# Altium PCB PCB1.PcbDoc
Units mil, origin at the board's own origin, x right, y up, seen from the top; angles counter-clockwise.
Board outline 6000 x 4000 mil, 2 copper layers (Top Layer, Bottom Layer); 15 components, 14 nets, 53 pads, 0 vias.
Unrouted connection lines stored in the file: 17.
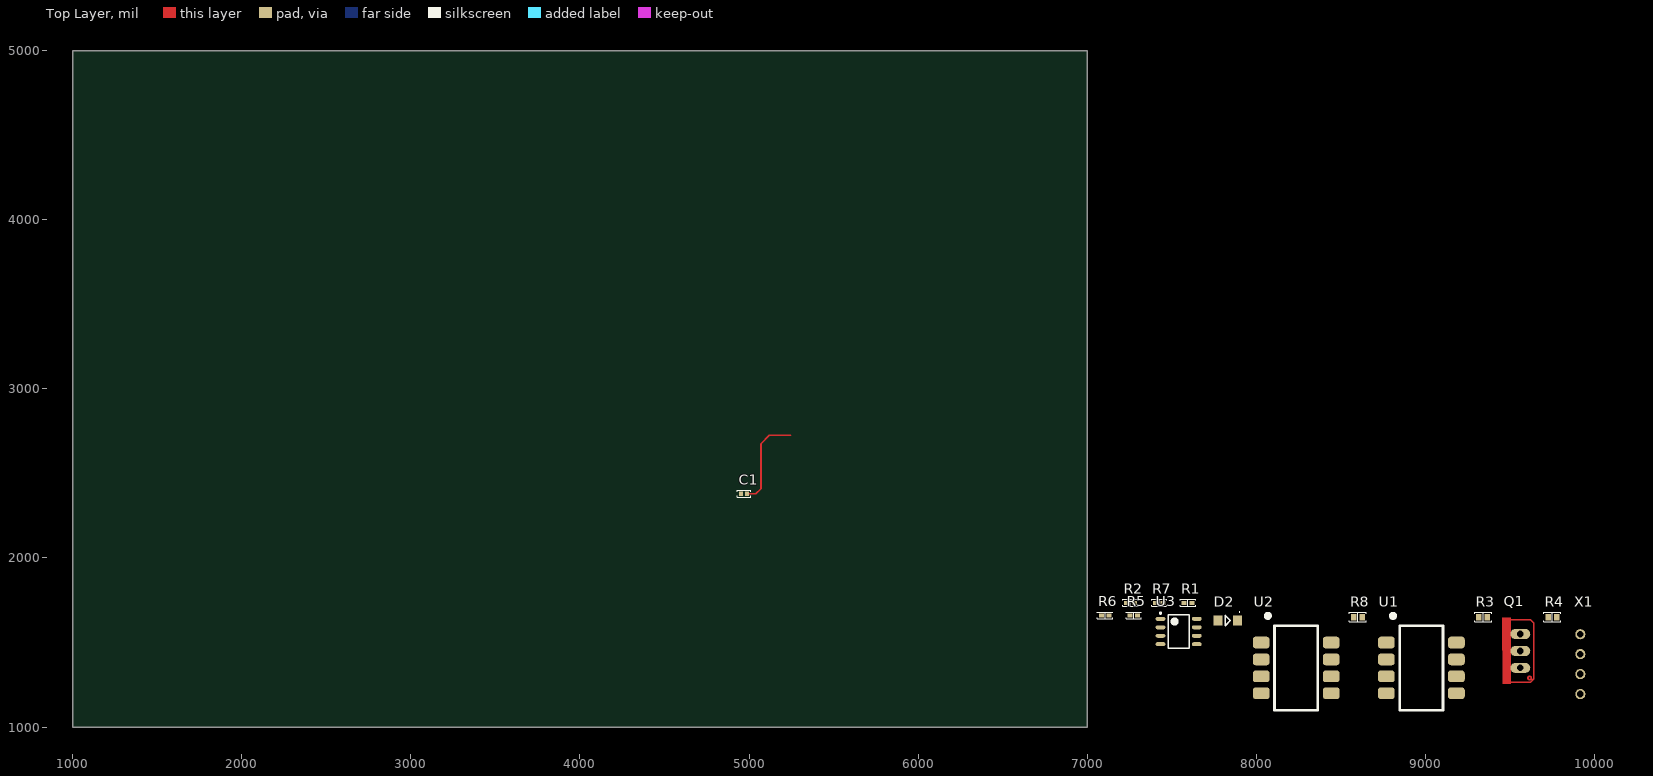
[diagram p0: Top Layer view]
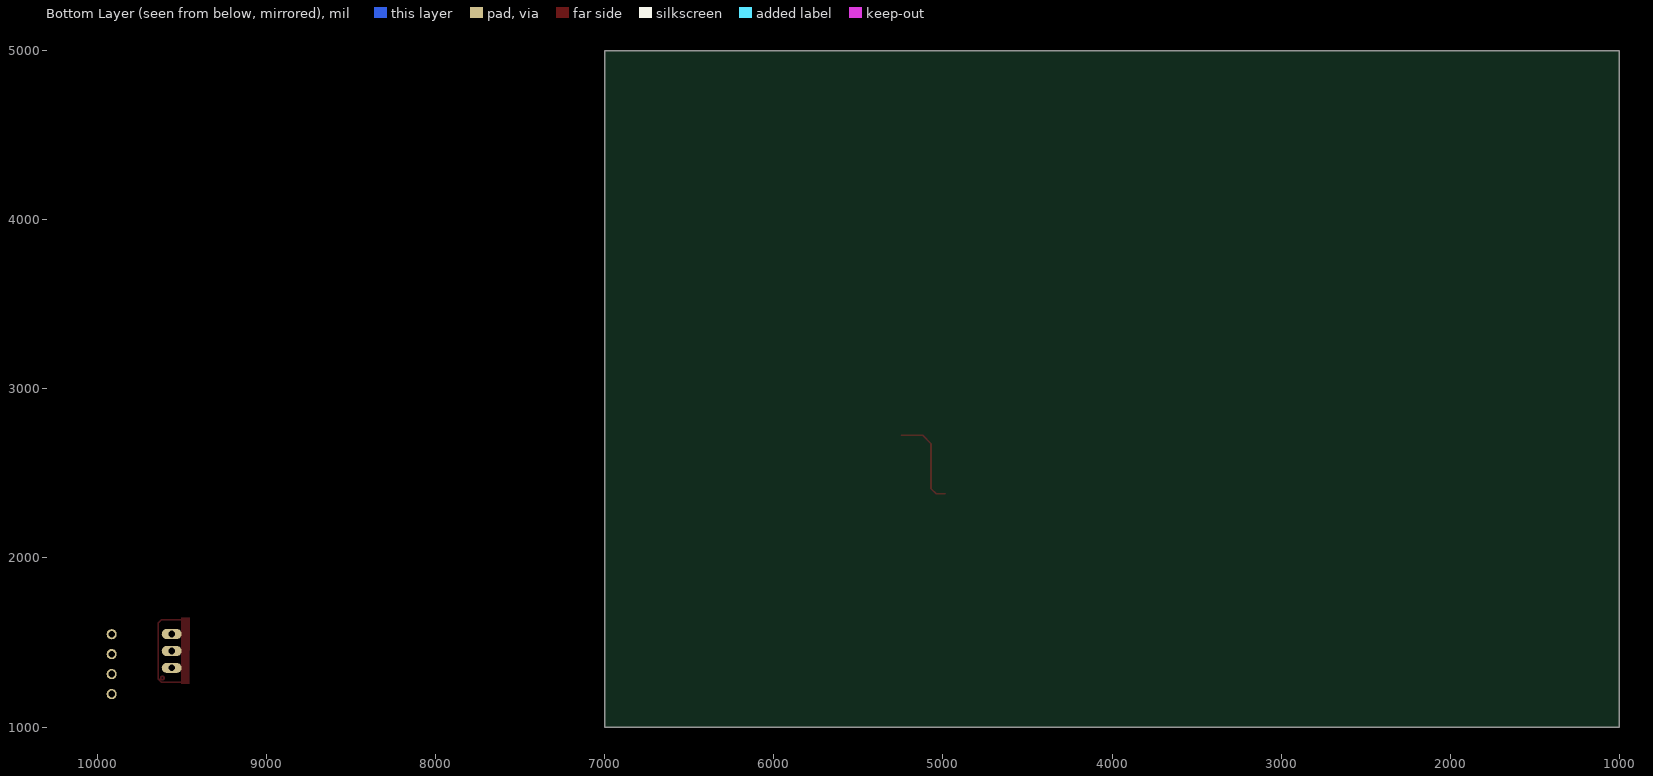
[diagram p1: Bottom Layer view, seen from below]

## Layer stack, top to bottom
Top Solder: solder mask 0.4, Solder Resist, Dk 3.5
Top Layer: signal copper 1.4
Dielectric 1: dielectric 12.6, FR-4, Dk 4.8
Bottom Layer: signal copper 1.4
Bottom Solder: solder mask 0.4, Solder Resist, Dk 3.5

## Board outline
1000,1000 7000,1000 7000,5000 1000,5000

## Design rules (kind name [scope] priority, off if disabled: settings)
Clearance [All] p1: gap=10 ignorepadtopadclearanceinfootprint=FALSE except(0: Arc-Hole Track-Hole SMDPad-Hole THPad-Hole Via-Hole Fill-Hole Poly-Hole Region-Hole Text-Hole)
PolygonConnect [All] p1: connectstyle=Relief reliefconductorwidth=10 reliefentries=4 polygonreliefangle="90 Angle" airgapwidth=10
RoomDefinition HVSchematic [InComponentClass('HVSchematic')] p1: confinementstyle=ConfineIn formatcopy=TRUE lockcomponents=FALSE outline 7045,1060 9165,1060 9165,1865 7045,1865
RoutingVias [All] p1: holewidth=28 width=50 viastyle="Through Hole" minholewidth=28 minwidth=50 maxholewidth=28 maxwidth=50
SolderMaskExpansion [All] p1: expansion=4
Width [All] p1: maxlimit=10 minlimit=10 preferedwidth=10
30 further rules are at their usual default settings.

## Components (designator, comment, footprint, x,y, rotation, side; value= is the part's Value field where it differs from the comment)
C1 "Capacitor MLCC 1.0pf 16V CAP 0402/1005" "CAP 0402/1005" 4970,2380 r0 top value=1.0pf
D2 "DDZ9701-7" SOD123F 7830,1630 r0 top value=14Vz
Q1 "FQP3P50" TO-220AB 9560,1450 r90 top value=P_Channel
R1 "Resistor 1.0 0402 1/10W 1%" "RES 0402/1005" 7595,1735 r0 top value=1.0
R2 "Resistor 1.0 0402 1/10W 1%" "RES 0402/1005" 7255,1735 r0 top value=1.0
R3 "Resistor 1.0M 0603 1/10W 10%" "RES 0603/1608" 9340,1650 r0 top value=1.0M
R4 "Temporary" "RES 0603/1608" 9750,1650 r0 top value=1.2k
R5 "Resistor 1.0 0402 1/10W 1%" "RES 0402/1005" 7275,1660 r0 top value=1.0
R6 "Resistor 1.0 0402 1/10W 1%" "RES 0402/1005" 7105,1660 r0 top value=1.0
R7 "Resistor 1.0 0402 1/10W 1%" "RES 0402/1005" 7425,1735 r0 top value=1.0
R8 "Resistor 33M 0603 1/10W 10%" "RES 0603/1608" 8600,1650 r0 top value=33M
U1 "VO2223B" "Option 7" 8975,1350 r0 top
U2 "VO2223B" "Option 7" 8235,1350 r0 top
U3 "LM555 Timer" SOIC-8 7540,1565 r0 top
X1 "43650-0402" Molex_43650_0402 9915,1195 r0 top value=CONN

## Footprints (in the part's own frame and the unit in brackets; to place one, negate y for a bottom-side part, rotate by r counter-clockwise, add the part's x,y. Pads: shape width x height; smd on the part's side, far side on the other; paste and mask are expansions set on the pad)
"CAP 0402/1005" [mm] "Chip Capacitor, 2-Leads, Body 1.02x0.51mm, IPC Medium Density"
  rect 0.6x0.64 smd: 1(-0.44,0) 2(0.44,0)
  silkscreen extent -1,-0.5 1,0.5, body extent -0.5,-0.26 0.5,0.26, height 0.52
Molex_43650_0402 [mm]
  round 1.524 hole 1.02: 1(0,0) 2(0,3) 3(0,6) 4(0,9)
  round 0 hole 3.1: 5(4.32,2.15)
  round 0 hole 3: 5(4.32,6.85)
  body extent -1.15,-3.32 8.75,12.33, height 5.57
"Option 7" [mm]
  rrect50% 2.52x1.75 smd mask+0.102: 1(-5.26,3.81)
  rrect50% 2.52x1.75 smd: 2(-5.26,1.27) 3(-5.26,-1.27) 4(-5.26,-3.81) 5(5.26,-3.81) 6(5.26,-1.27) 7(5.26,1.27) 8(5.26,3.81)
  silkscreen extent -4.56,-6.35 3.26,8.11
"RES 0402/1005" [mm] "Chip Resistor, 2-Leads, Body 1.0x0.5mm, IPC Medium Density"
  rect 0.75x0.6 smd: 1(-0.575,0) 2(0.575,0)
  silkscreen extent -1.14,-0.51 1.14,0.51, body extent -0.5,-0.25 0.5,0.25, height 0.35
"RES 0603/1608" [mm] "Chip Resistor, 2-Leads, Body 1.60x0.80mm, IPC Medium Density"
  rect 0.85x0.95 smd: 1(-0.65,0) 2(0.65,0)
  silkscreen extent -1.27,-0.7 1.27,0.7, body extent -0.8,-0.4 0.8,0.4, height 0.45
SOD123F [mm] "SODFL, 2-Leads, Body 1.80x3.50mm, IPC Low Density"
  rect 1.35x1.45 smd: 1(-1.475,0) 2(1.475,0)
  silkscreen extent -0.38,-0.76 1.8,1.29, body extent -1.75,-0.95 1.75,0.95, height 1.15
SOIC-8 [mm] "SOIC, 8-Leads, Body 4.90x3.90mm, Pitch 1.27mm, IPC Medium Density"
  oval 1.45x0.6 smd: 1(-2.725,1.905) 2(-2.725,0.635) 3(-2.725,-0.635) 4(-2.725,-1.905) 5(2.725,-1.905) 6(2.725,-0.635) 7(2.725,0.635) 8(2.725,1.905)
  silkscreen extent -2.85,-2.5 1.6,2.88, body extent -3,-2.5 3,2.5, height 1.75
TO-220AB [mm] "TO-220AB, MOSFET, DIODE, BJT"
  oval 1.5x3 hole 1: 1(-2.54,0) 2(0,0) 3(2.54,0)
  Top Layer circle w0.254: c-4.064,-1.397 r0.254
  Top Layer region: -4.947,1.367 5.053,1.412 5.047,2.712 -4.953,2.667
  Top Layer lines w0.254: -4.699,1.412 -4.699,-1.524 -4.191,-2.032 4.191,-2.032 4.699,-1.524 4.699,1.412
  body extent -5.94,-1.75 5.94,2.65, height 19.11

## Part data
C1: library part 1, Dielectric=Ceramic, Package="CAP 0402/1005", Voltage_Rating=16V, Created_By="Nick Mah", Created_Date=10/20/2018, Drawer_id=1, idCapacitor=1, Manufacturer_id=1, Name="Cap_1.0pf_16V_CAP 0402/1005"
D2: library part 10, "Zener Diode 14V 500mW ±5% Surface Mount SOD-123", Manufacturer_id=8, Package=SOD-123, Power=500mW, Supplier1PartNo=DDZ9701-7DICT-ND, ComponentLink1Description=Datasheet, ComponentLink1URL=https://www.diodes.com/assets/Datasheets/ds30410.pdf, Drawer_id=1, idDiode=10, Link=https://www.digikey.com/product-detail/en/diodes-incorporated/DDZ9701-7/DDZ9701-7DICT-ND/3877402, MfrPartNo=DDZ9701-7, Name=DDZ9701, Num_Circuits=1, Supplier1=Digi-Key, Type=Zener
Q1: library part 5, Manufacturer_id=1, Package=TO-220, Power(Max)=85W, Supplier1PartNo=FQP3P50-ND, Created_By=Angel, Drawer_id=1, Id=2.7A, idFETs=5, Link=https://www.digikey.com/product-detail/en/on-semiconductor/FQP3P50/FQP3P50-ND/1055021, MfrPartNo=FQP3P50, Name=FQP3P50, Num_Circuits=1, Rds_On=4Ohms, Supplier1=Digi-Key, Vdss=500V, Vgs(Max)=5.0V, Vgs(typ)=4.0v
R1 R2 R5 R6 R7: library part 1, Package=0402, Power=1/10W, Tolerance=1%, ComponentLink1Description=Datasheet, Created_By="Nick Mah", Created_Date=2018-10-20, Drawer_id=1, idResistor=1, Manufacturer_id=1, Name=Res_1.0_0402_1/10W_1%, Supplier 1=Digi-Key
R3: library part 2341, Manufacturer_id=1, Package=0603, Power=1/10W, Tolerance=10%, ComponentLink1Description=Datasheet, Created_By="Nick Mah", Created_Date=2018-10-20, Drawer_id=1, idResistor=2341, Name=Res_1.0M_0603_1/10W_10%, Supplier 1=Digi-Key
R4: library part 2306, Manufacturer_id=1, Package=0603, Power=1/10W, Tolerance=10%, ComponentLink1Description=Datasheet, Created_By="Nick Mah", Created_Date=2018-10-20, Drawer_id=1, idResistor=2306, Name=Res_1.2k_0603_1/10W_10%, Supplier 1=Digi-Key
R8: library part 2359, Manufacturer_id=1, Package=0603, Power=1/10W, Tolerance=10%, ComponentLink1Description=Datasheet, Created_By="Nick Mah", Created_Date=2018-10-20, Drawer_id=1, idResistor=2359, Name=Res_33M_0603_1/10W_10%, Supplier 1=Digi-Key
U1 U2: library part 19, "Optocoupler, Power Phototriac", Manufacturer_id=1, Drawer_id=1, idIC_Misc=19, Name="VO2223B Optocoupler"
U3: library part 17, Manufacturer_id=1, Drawer_id=1, idIC_Misc=17, Name="LM555 Timer"
X1: library part 6, Manufacturer_id=4, Package=Conn, Supplier1PartNo=WM11252-ND, Voltage_Rating=600V, ComponentLink1Description=Datasheet, ComponentLink1URL=https://www.mouser.com/datasheet/2/276/0436500402_PCB_HEADERS-148886.pdf, Created_By=Nick, Drawer_id=1, idConn=6, Link=https://www.digikey.com/product-detail/en/molex-llc/0436500402/WM11252-ND/3310554, MfrPartNo=43650-0402, Name="Molex 43650_0402", Num_Contacts=4, Num_Rows=1, Pitch=3mm, Supplier1=Digi-Key

## Nets (pads, with @x,y where several pads share a name; then routed paths per layer and width w, separated by ;. In a path a pad name is that pad's centre, name@x,y a point inside that pad or via, vN(x,y) a via of type N, cw(c..) or ccw(c..) an arc to the next point about the centre after c; other vN are vias at no path point)
ACCHV+: Q1.2 R3.1 X1.1
GND: U3.1
HV-: R8.1 X1.3
HV-?: R5.1
MCHV+: Q1.3 R4.1 U2.8 X1.2
MCHV-: R6.1
NetC1_2: C1.2 R2.2 U3.2 U3.7 | length 555.8
  Top Layer w10: C1.2 5040,2380 5070,2410 5070,2675 5120,2725 5245,2725
NetQ1_1: Q1.1 R3.2 U1.8
NetR1_1: R1.1 R2.1 U3.6
NetR5_2: R5.2 U2.5
NetR7_1: R7.1 U3.3
NetR8_2: R8.2 U1.5
"NOT(Master Switch)": U2.1
VCC: R1.2 U3.5
pads on no net: C1.1 D2.1 D2.2 R4.2 R6.2 R7.2 U1.1 U1.2 U1.3 U1.4 U1.6 U1.7 U2.2 U2.3 U2.4 U2.6 U2.7 U3.4 U3.8 X1.4 X1.5